# EAGLE board LED_Array (EAGLE 8.6.1)
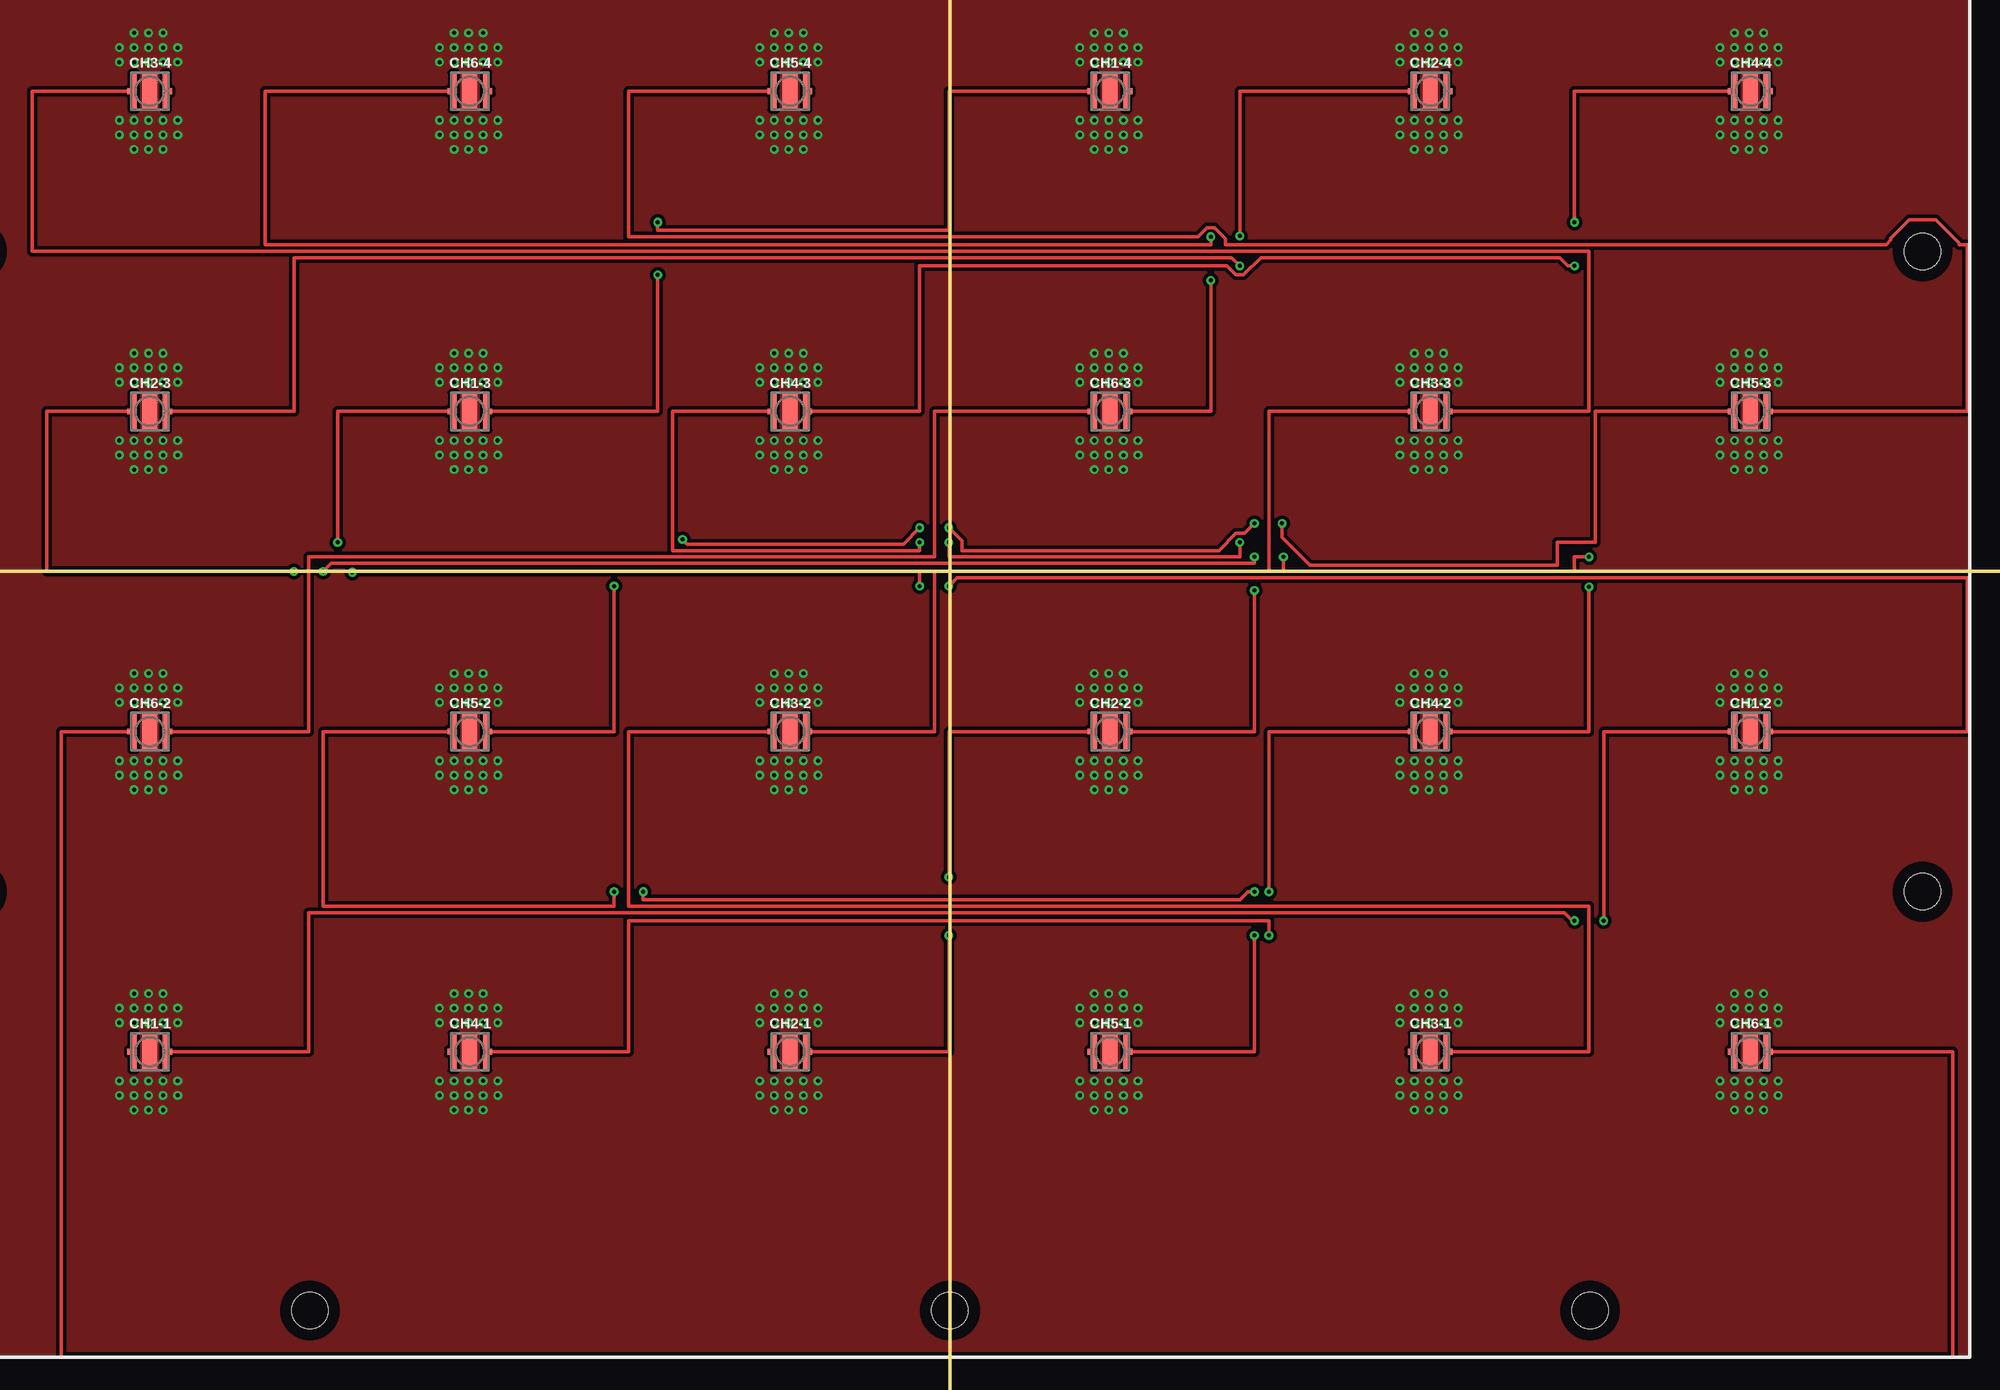
[diagram p0: board, top side]
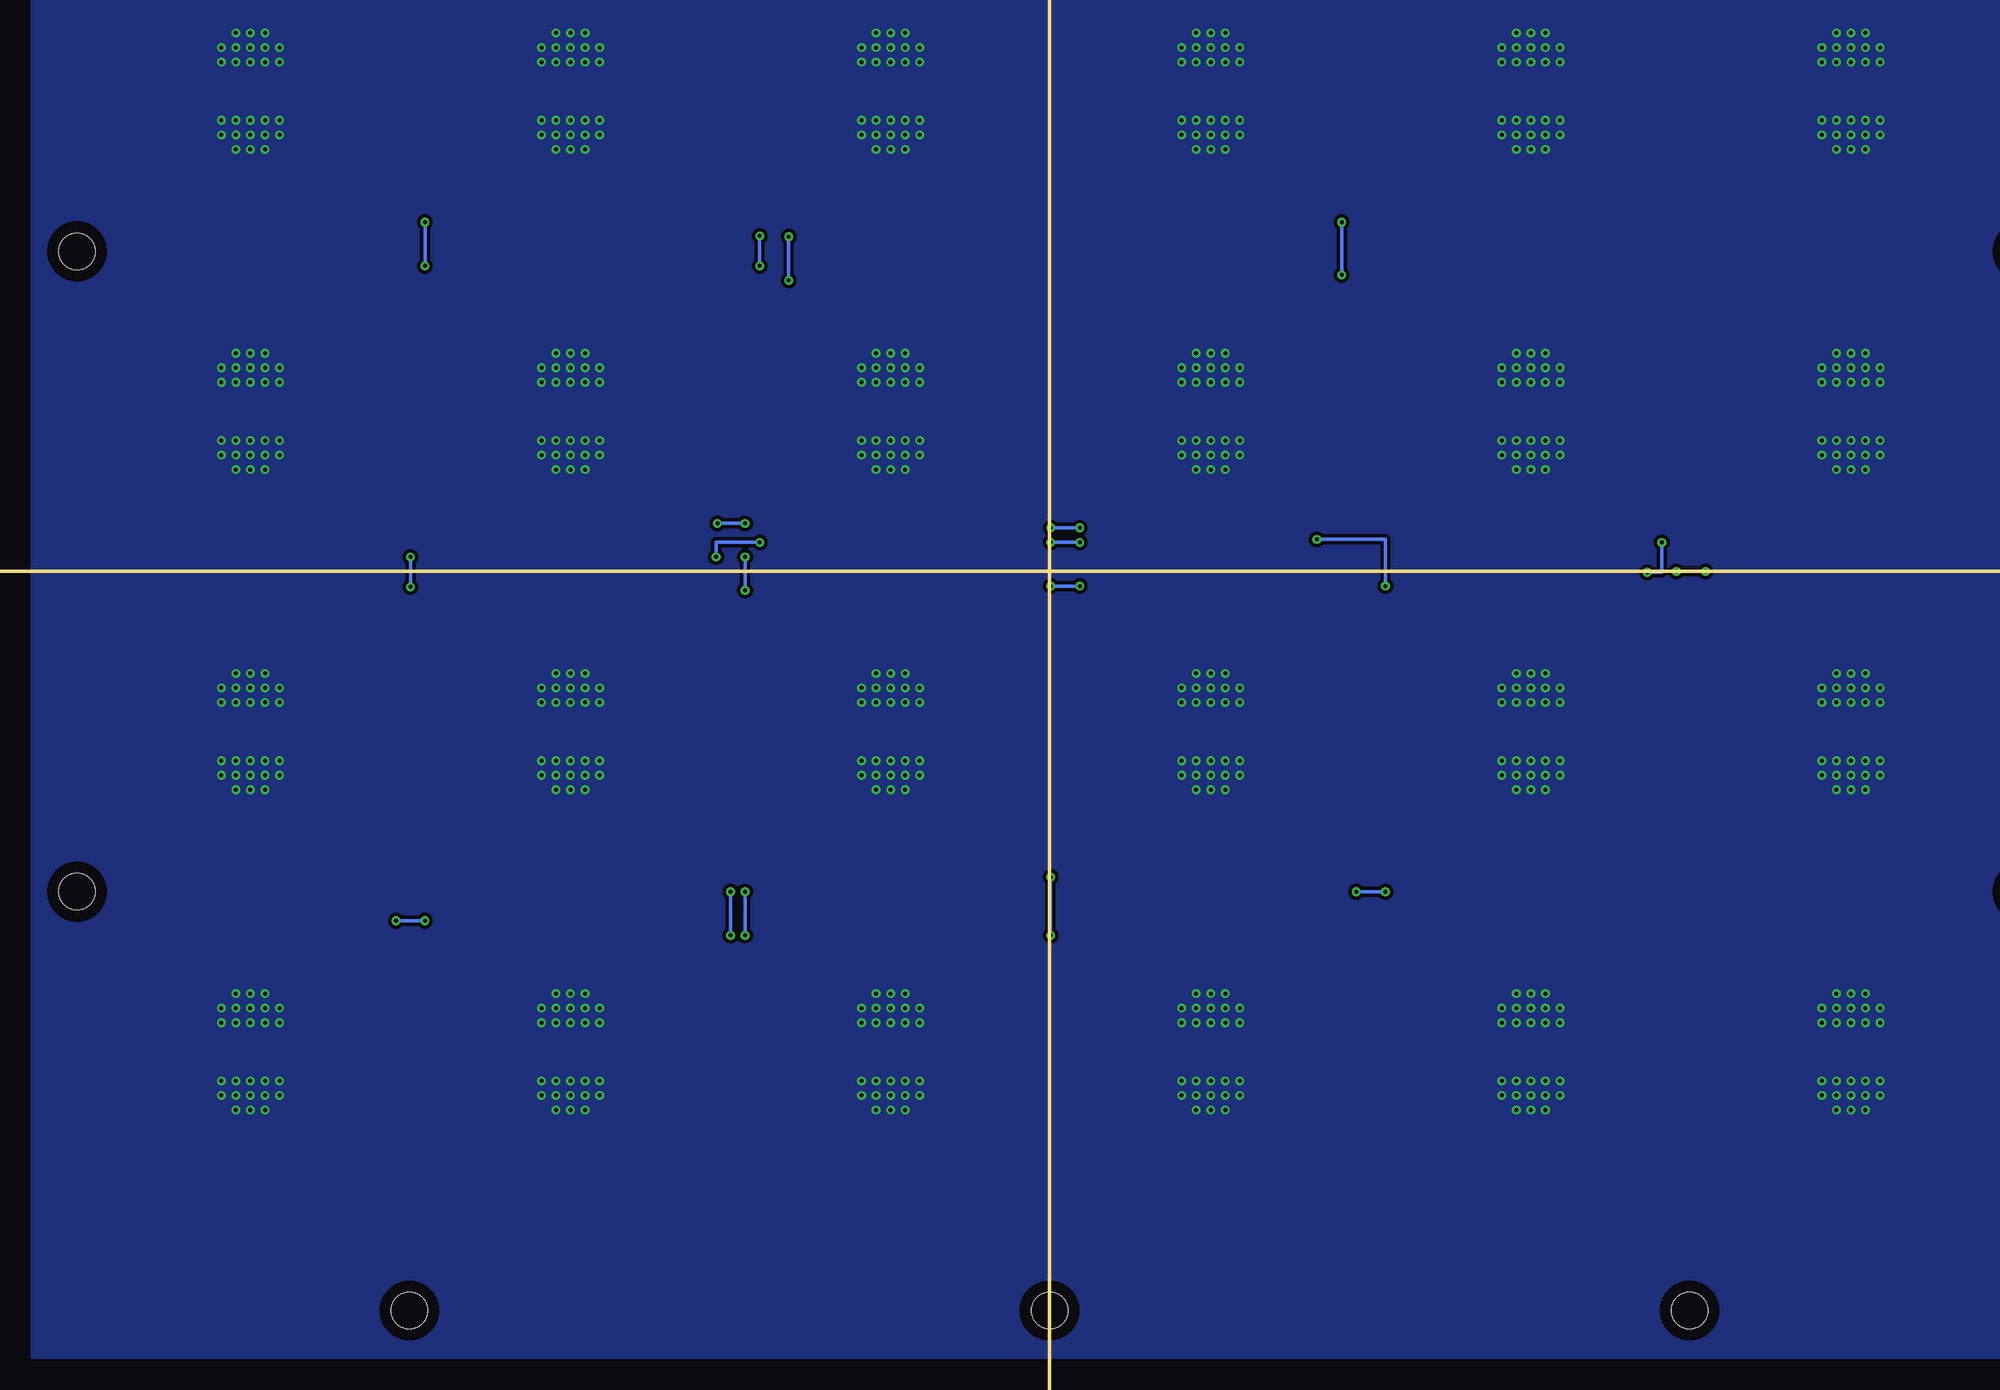
[diagram p1: board, bottom side, seen from below]

No outline drawn. Coordinates in mm, seen from the top.
Copper layers (1*16): Top 0.035mm / dielectric 1.5mm / Bottom 0.035mm
Design rules "default *": minimum track width 6mil, minimum drill 0.35mm, track to track 10mil, track to pad 10mil, pad to pad 6mil, via to via 6mil, smd to smd 6mil, copper to edge 40mil, drill to drill 6mil, minimum pad ring 10mil, minimum via ring 8mil, stop-mask expansion 4mil, vias tented up to drill 0mil, thermal gap 10mil
Holes 3.17 mm at 4.09,40.64 4.09,96.52 33.12,133.07 89,133.07 144.88,133.07 173.89,96.52 173.89,40.64 144.88,4.09 89,4.09 33.12,4.09
Milling: 2 lines

## Footprints (pad centres in the part's own frame; a part is rotated, then mirrored left to right if it is on the bottom)
CREE-XLAMP-XP-E = smd 0.5 x 3.3: A 1.4,0; C -1.4,0 | smd 0.45 x 0.5: A@1 1.725,0; C@1 -1.725,0 | smd 1.3 x 3.3: THERM 0,0

## Placement (x,y rotation side)
CH1-1  XP-E  [CREE-XLAMP-XP-E]  19.15,26.67 0 top
CH1-2  XP-E  [CREE-XLAMP-XP-E]  158.85,54.61 0 top
CH1-3  XP-E  [CREE-XLAMP-XP-E]  47.09,82.55 0 top
CH1-4  XP-E  [CREE-XLAMP-XP-E]  102.97,110.49 0 top
CH2-1  XP-E  [CREE-XLAMP-XP-E]  75.03,26.67 0 top
CH2-2  XP-E  [CREE-XLAMP-XP-E]  102.97,54.61 0 top
CH2-3  XP-E  [CREE-XLAMP-XP-E]  19.15,82.55 0 top
CH2-4  XP-E  [CREE-XLAMP-XP-E]  130.91,110.49 0 top
CH3-1  XP-E  [CREE-XLAMP-XP-E]  130.91,26.67 0 top
CH3-2  XP-E  [CREE-XLAMP-XP-E]  75.03,54.61 0 top
CH3-3  XP-E  [CREE-XLAMP-XP-E]  130.91,82.55 0 top
CH3-4  XP-E  [CREE-XLAMP-XP-E]  19.15,110.49 0 top
CH4-1  XP-E  [CREE-XLAMP-XP-E]  47.09,26.67 0 top
CH4-2  XP-E  [CREE-XLAMP-XP-E]  130.91,54.61 0 top
CH4-3  XP-E  [CREE-XLAMP-XP-E]  75.03,82.55 0 top
CH4-4  XP-E  [CREE-XLAMP-XP-E]  158.85,110.49 0 top
CH5-1  XP-E  [CREE-XLAMP-XP-E]  102.97,26.67 0 top
CH5-2  XP-E  [CREE-XLAMP-XP-E]  47.09,54.61 0 top
CH5-3  XP-E  [CREE-XLAMP-XP-E]  158.85,82.55 0 top
CH5-4  XP-E  [CREE-XLAMP-XP-E]  75.03,110.49 0 top
CH6-1  XP-E  [CREE-XLAMP-XP-E]  158.85,26.67 0 top
CH6-2  XP-E  [CREE-XLAMP-XP-E]  19.15,54.61 0 top
CH6-3  XP-E  [CREE-XLAMP-XP-E]  102.97,82.55 0 top
CH6-4  XP-E  [CREE-XLAMP-XP-E]  47.09,110.49 0 top

## Library data of the parts
CH1-1-CH1-4 CH2-1-CH2-4 CH3-1-CH3-4 CH4-1-CH4-4 CH5-1-CH5-4 CH6-1-CH6-4 = Tomaszewski

## Nets
N$1: CH2-1.A CH2-1.A@1 CH2-2.C CH2-2.C@1
N$2: CH2-2.A CH2-2.A@1 CH2-3.C CH2-3.C@1
N$3: CH2-3.A CH2-3.A@1 CH2-4.C CH2-4.C@1
N$4: CH4-1.A CH4-1.A@1 CH4-2.C CH4-2.C@1
N$5: CH4-2.A CH4-2.A@1 CH4-3.C CH4-3.C@1
N$6: CH4-3.A CH4-3.A@1 CH4-4.C CH4-4.C@1
N$7: CH6-1.A CH6-1.A@1 CH6-2.C CH6-2.C@1
N$8: CH6-2.A CH6-2.A@1 CH6-3.C CH6-3.C@1
N$9: CH6-3.A CH6-3.A@1 CH6-4.C CH6-4.C@1
N$10: CH1-1.A CH1-1.A@1 CH1-2.C CH1-2.C@1
N$11: CH1-2.A CH1-2.A@1 CH1-3.C CH1-3.C@1
N$12: CH1-3.A CH1-3.A@1 CH1-4.C CH1-4.C@1
N$13: CH3-1.A CH3-1.A@1 CH3-2.C CH3-2.C@1
N$14: CH3-2.A CH3-2.A@1 CH3-3.C CH3-3.C@1
N$15: CH3-3.A CH3-3.A@1 CH3-4.C CH3-4.C@1
N$16: CH5-1.A CH5-1.A@1 CH5-2.C CH5-2.C@1
N$17: CH5-2.A CH5-2.A@1 CH5-3.C CH5-3.C@1
N$18: CH5-3.A CH5-3.A@1 CH5-4.C CH5-4.C@1
T: CH1-1.THERM CH1-2.THERM CH1-3.THERM CH1-4.THERM CH2-1.THERM CH2-2.THERM CH2-3.THERM CH2-4.THERM CH3-1.THERM CH3-2.THERM CH3-3.THERM CH3-4.THERM CH4-1.THERM CH4-2.THERM CH4-3.THERM CH4-4.THERM CH5-1.THERM CH5-2.THERM CH5-3.THERM CH5-4.THERM CH6-1.THERM CH6-2.THERM CH6-3.THERM CH6-4.THERM

## Tracks (layer width: path | path; a pad name or v marks a point on that pad's centre or on a via)
N$1  (via drill 0.35)
  Top 0.305: CH2-2.C 88.9,54.61 v88.9,41.91 | v88.9,36.83 88.9,26.67 CH2-1.A@1
  Bottom 0.305: v88.9,41.91 v88.9,36.83
N$2  (via drill 0.35)
  Top 0.305: CH2-3.C@1 10.16,82.55 10.16,68.58 v31.75,68.58 | v34.29,68.58 35,69.29 115.57,69.29 v115.57,69.85 | v115.57,66.93 115.57,54.61 CH2-2.A@1
  Bottom 0.305: v31.75,68.58 v34.29,68.58 | v115.57,69.85 v115.57,66.93
N$3  (via drill 0.35)
  Top 0.305: CH2-4.C@1 114.3,110.49 v114.3,97.86 | v114.3,95.25 113.59,95.96 31.75,95.96 31.75,82.55 CH2-3.A
  Bottom 0.305: v114.3,97.86 v114.3,95.25
N$4  (via drill 0.35)
  Top 0.305: CH4-1.A 60.96,26.67 60.96,38.1 116.84,38.1 v116.84,36.83 | v116.84,40.64 116.84,54.61 CH4-2.C
  Bottom 0.305: v116.84,36.83 v116.84,40.64
N$5  (via drill 0.35)
  Top 0.305: CH4-2.A 144.78,54.61 v144.78,67.24 | v144.78,69.85 143.51,69.85 143.51,68.58 118.11,68.58 v118.11,69.85 | v114.3,71.12 114.3,69.85 88.9,69.85 v88.9,71.12 | v86.36,71.12 86.36,70.41 64.77,70.41 64.77,82.55 CH4-3.C@1
  Bottom 0.305: v144.78,67.24 v144.78,69.85 | v118.11,69.85 118.11,71.12 v114.3,71.12 | v88.9,71.12 v86.36,71.12
N$6  (via drill 0.35)
  Top 0.305: CH4-4.C 143.51,110.49 v143.51,99.06 | v143.51,95.25 142.95,95.25 142.24,95.96 116.12,95.96 114.62,94.47 113.97,94.47 113.19,95.25 86.36,95.25 86.36,82.55 CH4-3.A@1
  Bottom 0.305: v143.51,99.06 v143.51,95.25
N$7
  Top 0.305: CH6-2.C 11.43,54.61 11.43,0 176.53,0 176.53,26.67 CH6-1.A
N$8
  Top 0.305: CH6-3.C@1 87.63,82.55 87.63,69.85 33.02,69.85 33.02,54.61 CH6-2.A
N$9  (via drill 0.35)
  Top 0.305: 33.02,110.49 CH6-4.C@1 29.21,110.49 29.21,97.08 111.76,97.08 v111.76,97.79 | v111.76,93.98 111.76,82.55 CH6-3.A@1
  Bottom 0.305: v111.76,97.79 v111.76,93.98
N$10  (via drill 0.35)
  Top 0.305: CH1-2.C 146.05,54.61 v146.05,38.1 | v143.51,38.1 143.33,38.1 142.62,38.81 33.02,38.81 33.02,26.67 CH1-1.A@1
  Bottom 0.305: v146.05,38.1 v143.51,38.1
N$11  (via drill 0.35)
  Top 0.305: CH1-3.C 35.56,82.55 v35.56,71.12 | v36.83,68.51 36.83,68.58 86.36,68.58 v86.36,67.31 | v88.9,67.31 89.61,68.02 177.8,68.02 177.8,54.61 CH1-2.A@1
  Bottom 0.305: v35.56,71.12 35.56,68.51 v36.83,68.51 | v86.36,67.31 v88.9,67.31
N$12  (via drill 0.35)
  Top 0.305: CH1-4.C 88.9,110.49 88.9,98.35 63.5,98.35 v63.5,99.06 | v63.5,94.47 63.5,82.55 CH1-3.A
  Bottom 0.305: v63.5,99.06 v63.5,94.47
N$13
  Top 0.305: CH3-2.C 60.96,54.61 60.96,39.37 144.78,39.37 144.78,26.67 CH3-1.A@1
N$14
  Top 0.305: CH3-2.A@1 87.63,54.61 87.63,68.58 116.84,68.58 116.84,82.55 CH3-3.C@1
N$15
  Top 0.305: CH3-4.C@1 8.89,110.49 8.89,96.52 144.78,96.52 144.78,82.55 CH3-3.A@1
N$16  (via drill 0.35)
  Top 0.305: CH5-1.A 115.57,26.67 v115.57,36.83 | v115.57,40.64 115.01,40.64 114.3,39.93 62.23,39.93 v62.23,40.64 | v59.69,40.64 59.69,39.37 34.29,39.37 34.29,54.61 CH5-2.C
  Bottom 0.305: v115.57,36.83 v115.57,40.64 | v62.23,40.64 v59.69,40.64
N$17  (via drill 0.35)
  Top 0.305: CH5-2.A 59.69,54.61 v59.69,67.31 | v65.66,71.37 66.06,70.97 84.94,70.97 v86.36,72.39 | v88.9,72.39 90.04,71.25 90.04,70.41 112.48,70.41 113.97,71.91 114.7,71.91 v115.57,72.77 | v117.98,72.77 117.98,71.55 120.4,69.14 142.01,69.14 142.01,71.12 145.34,71.12 145.34,82.55 CH5-3.C@1
  Bottom 0.305: v59.69,67.31 59.69,71.37 v65.66,71.37 | v86.36,72.39 v88.9,72.39 | v115.57,72.77 v117.98,72.77
N$18
  Top 0.305: CH5-4.C@1 60.96,110.49 60.96,97.79 110.65,97.79 111.44,98.58 112.08,98.58 113.03,97.63 113.03,97.08 170.7,97.08 171.13,97.51 171.13,97.66 172.75,99.28 175.03,99.28 177.23,97.08 | CH5-3.A 177.8,82.55 177.8,97.08 177.23,97.08 | 177.07,97.08 177.23,97.08
T  (via drill 0.35)
  other vias: 16.51,113.03 16.51,114.3 17.78,115.57 17.78,114.3 17.78,113.03 19.05,115.57 19.05,114.3 19.05,113.03 20.32,115.57 20.32,114.3 20.32,113.03 21.59,114.3 21.59,113.03 16.51,107.95 17.78,107.95 19.05,107.95 20.32,107.95 21.59,107.95 21.59,106.68 20.32,106.68 19.05,106.68 17.78,106.68 16.51,106.68 17.78,105.41 19.05,105.41 20.32,105.41 44.45,113.03 44.45,114.3 45.72,115.57 45.72,114.3 45.72,113.03 46.99,115.57 46.99,114.3 46.99,113.03 48.26,115.57 48.26,114.3 48.26,113.03 49.53,114.3 49.53,113.03 44.45,107.95 45.72,107.95 46.99,107.95 48.26,107.95 49.53,107.95 49.53,106.68 48.26,106.68 46.99,106.68 45.72,106.68 44.45,106.68 45.72,105.41 46.99,105.41 48.26,105.41 72.39,113.03 72.39,114.3 73.66,115.57 73.66,114.3 73.66,113.03 74.93,115.57 74.93,114.3 74.93,113.03 76.2,115.57 76.2,114.3 76.2,113.03 77.47,114.3 77.47,113.03 72.39,107.95 73.66,107.95 74.93,107.95 76.2,107.95 77.47,107.95 77.47,106.68 76.2,106.68 74.93,106.68 73.66,106.68 72.39,106.68 73.66,105.41 74.93,105.41 76.2,105.41 100.33,113.03 100.33,114.3 101.6,115.57 101.6,114.3 101.6,113.03 102.87,115.57 102.87,114.3 102.87,113.03 104.14,115.57 104.14,114.3 104.14,113.03 105.41,114.3 105.41,113.03 100.33,107.95 101.6,107.95 102.87,107.95 104.14,107.95 105.41,107.95 105.41,106.68 104.14,106.68 102.87,106.68 101.6,106.68 100.33,106.68 101.6,105.41 102.87,105.41 104.14,105.41 128.27,113.03 128.27,114.3 129.54,115.57 129.54,114.3 129.54,113.03 130.81,115.57 130.81,114.3 130.81,113.03 132.08,115.57 132.08,114.3 132.08,113.03 133.35,114.3 133.35,113.03 128.27,107.95 129.54,107.95 130.81,107.95 132.08,107.95 133.35,107.95 133.35,106.68 132.08,106.68 130.81,106.68 129.54,106.68 128.27,106.68 129.54,105.41 130.81,105.41 132.08,105.41 156.21,113.03 156.21,114.3 157.48,115.57 157.48,114.3 157.48,113.03 158.75,115.57 158.75,114.3 158.75,113.03 160.02,115.57 160.02,114.3 160.02,113.03 161.29,114.3 161.29,113.03 156.21,107.95 157.48,107.95 158.75,107.95 160.02,107.95 161.29,107.95 161.29,106.68 160.02,106.68 158.75,106.68 157.48,106.68 156.21,106.68 157.48,105.41 158.75,105.41 160.02,105.41 16.51,29.21 16.51,30.48 17.78,31.75 17.78,30.48 17.78,29.21 19.05,31.75 19.05,30.48 19.05,29.21 20.32,31.75 20.32,30.48 20.32,29.21 21.59,30.48 21.59,29.21 16.51,24.13 17.78,24.13 19.05,24.13 20.32,24.13 21.59,24.13 21.59,22.86 20.32,22.86 19.05,22.86 17.78,22.86 16.51,22.86 17.78,21.59 19.05,21.59 20.32,21.59 44.45,29.21 44.45,30.48 45.72,31.75 45.72,30.48 45.72,29.21 46.99,31.75 46.99,30.48 46.99,29.21 48.26,31.75 48.26,30.48 48.26,29.21 49.53,30.48 49.53,29.21 44.45,24.13 45.72,24.13 46.99,24.13 48.26,24.13 49.53,24.13 49.53,22.86 48.26,22.86 46.99,22.86 45.72,22.86 44.45,22.86 45.72,21.59 46.99,21.59 48.26,21.59 72.39,29.21 72.39,30.48 73.66,31.75 73.66,30.48 73.66,29.21 74.93,31.75 74.93,30.48 74.93,29.21 76.2,31.75 76.2,30.48 76.2,29.21 77.47,30.48 77.47,29.21 72.39,24.13 73.66,24.13 74.93,24.13 76.2,24.13 77.47,24.13 77.47,22.86 76.2,22.86 74.93,22.86 73.66,22.86 72.39,22.86 73.66,21.59 74.93,21.59 76.2,21.59 100.33,29.21 100.33,30.48 101.6,31.75 101.6,30.48 101.6,29.21 102.87,31.75 102.87,30.48 102.87,29.21 104.14,31.75 104.14,30.48 104.14,29.21 105.41,30.48 105.41,29.21 100.33,24.13 101.6,24.13 102.87,24.13 104.14,24.13 105.41,24.13 105.41,22.86 104.14,22.86 102.87,22.86 101.6,22.86 100.33,22.86 101.6,21.59 102.87,21.59 104.14,21.59 128.27,29.21 128.27,30.48 129.54,31.75 129.54,30.48 129.54,29.21 130.81,31.75 130.81,30.48 130.81,29.21 132.08,31.75 132.08,30.48 132.08,29.21 133.35,30.48 133.35,29.21 128.27,24.13 129.54,24.13 130.81,24.13 132.08,24.13 133.35,24.13 133.35,22.86 132.08,22.86 130.81,22.86 129.54,22.86 128.27,22.86 129.54,21.59 130.81,21.59 132.08,21.59 156.21,29.21 156.21,30.48 157.48,31.75 157.48,30.48 157.48,29.21 158.75,31.75 158.75,30.48 158.75,29.21 160.02,31.75 160.02,30.48 160.02,29.21 161.29,30.48 161.29,29.21 156.21,24.13 157.48,24.13 158.75,24.13 160.02,24.13 161.29,24.13 161.29,22.86 160.02,22.86 158.75,22.86 157.48,22.86 156.21,22.86 157.48,21.59 158.75,21.59 160.02,21.59 16.51,57.15 16.51,58.42 17.78,59.69 17.78,58.42 17.78,57.15 19.05,59.69 19.05,58.42 19.05,57.15 20.32,59.69 20.32,58.42 20.32,57.15 21.59,58.42 21.59,57.15 16.51,52.07 17.78,52.07 19.05,52.07 20.32,52.07 21.59,52.07 21.59,50.8 20.32,50.8 19.05,50.8 17.78,50.8 16.51,50.8 17.78,49.53 19.05,49.53 20.32,49.53 44.45,57.15 44.45,58.42 45.72,59.69 45.72,58.42 45.72,57.15 46.99,59.69 46.99,58.42 46.99,57.15 48.26,59.69 48.26,58.42 48.26,57.15 49.53,58.42 49.53,57.15 44.45,52.07 45.72,52.07 46.99,52.07 48.26,52.07 49.53,52.07 49.53,50.8 48.26,50.8 46.99,50.8 45.72,50.8 44.45,50.8 45.72,49.53 46.99,49.53 48.26,49.53 72.39,57.15 72.39,58.42 73.66,59.69 73.66,58.42 73.66,57.15 74.93,59.69 74.93,58.42 74.93,57.15 76.2,59.69 76.2,58.42 76.2,57.15 77.47,58.42 77.47,57.15 72.39,52.07 73.66,52.07 74.93,52.07 76.2,52.07 77.47,52.07 77.47,50.8 76.2,50.8 74.93,50.8 73.66,50.8 72.39,50.8 73.66,49.53 74.93,49.53 76.2,49.53 100.33,57.15 100.33,58.42 101.6,59.69 101.6,58.42 101.6,57.15 102.87,59.69 102.87,58.42 102.87,57.15 104.14,59.69 104.14,58.42 104.14,57.15 105.41,58.42 105.41,57.15 100.33,52.07 101.6,52.07 102.87,52.07 104.14,52.07 105.41,52.07 105.41,50.8 104.14,50.8 102.87,50.8 101.6,50.8 100.33,50.8 101.6,49.53 102.87,49.53 104.14,49.53 128.27,57.15 128.27,58.42 129.54,59.69 129.54,58.42 129.54,57.15 130.81,59.69 130.81,58.42 130.81,57.15 132.08,59.69 132.08,58.42 132.08,57.15 133.35,58.42 133.35,57.15 128.27,52.07 129.54,52.07 130.81,52.07 132.08,52.07 133.35,52.07 133.35,50.8 132.08,50.8 130.81,50.8 129.54,50.8 128.27,50.8 129.54,49.53 130.81,49.53 132.08,49.53 156.21,57.15 156.21,58.42 157.48,59.69 157.48,58.42 157.48,57.15 158.75,59.69 158.75,58.42 158.75,57.15 160.02,59.69 160.02,58.42 160.02,57.15 161.29,58.42 161.29,57.15 156.21,52.07 157.48,52.07 158.75,52.07 160.02,52.07 161.29,52.07 161.29,50.8 160.02,50.8 158.75,50.8 157.48,50.8 156.21,50.8 157.48,49.53 158.75,49.53 160.02,49.53 16.51,85.09 16.51,86.36 17.78,87.63 17.78,86.36 17.78,85.09 19.05,87.63 19.05,86.36 19.05,85.09 20.32,87.63 20.32,86.36 20.32,85.09 21.59,86.36 21.59,85.09 16.51,80.01 17.78,80.01 19.05,80.01 20.32,80.01 21.59,80.01 21.59,78.74 20.32,78.74 19.05,78.74 17.78,78.74 16.51,78.74 17.78,77.47 19.05,77.47 20.32,77.47 44.45,85.09 44.45,86.36 45.72,87.63 45.72,86.36 45.72,85.09 46.99,87.63 46.99,86.36 46.99,85.09 48.26,87.63 48.26,86.36 48.26,85.09 49.53,86.36 49.53,85.09 44.45,80.01 45.72,80.01 46.99,80.01 48.26,80.01 49.53,80.01 49.53,78.74 48.26,78.74 46.99,78.74 45.72,78.74 44.45,78.74 45.72,77.47 46.99,77.47 48.26,77.47 72.39,85.09 72.39,86.36 73.66,87.63 73.66,86.36 73.66,85.09 74.93,87.63 74.93,86.36 74.93,85.09 76.2,87.63 76.2,86.36 76.2,85.09 77.47,86.36 77.47,85.09 72.39,80.01 73.66,80.01 74.93,80.01 76.2,80.01 77.47,80.01 77.47,78.74 76.2,78.74 74.93,78.74 73.66,78.74 72.39,78.74 73.66,77.47 74.93,77.47 76.2,77.47 100.33,85.09 100.33,86.36 101.6,87.63 101.6,86.36 101.6,85.09 102.87,87.63 102.87,86.36 102.87,85.09 104.14,87.63 104.14,86.36 104.14,85.09 105.41,86.36 105.41,85.09 100.33,80.01 101.6,80.01 102.87,80.01 104.14,80.01 105.41,80.01 105.41,78.74 104.14,78.74 102.87,78.74 101.6,78.74 100.33,78.74 101.6,77.47 102.87,77.47 104.14,77.47 128.27,85.09 128.27,86.36 129.54,87.63 129.54,86.36 129.54,85.09 130.81,87.63 130.81,86.36 130.81,85.09 132.08,87.63 132.08,86.36 132.08,85.09 133.35,86.36 133.35,85.09 128.27,80.01 129.54,80.01 130.81,80.01 132.08,80.01 133.35,80.01 133.35,78.74 132.08,78.74 130.81,78.74 129.54,78.74 128.27,78.74 129.54,77.47 130.81,77.47 132.08,77.47 156.21,85.09 156.21,86.36 157.48,87.63 157.48,86.36 157.48,85.09 158.75,87.63 158.75,86.36 158.75,85.09 160.02,87.63 160.02,86.36 160.02,85.09 161.29,86.36 161.29,85.09 156.21,80.01 157.48,80.01 158.75,80.01 160.02,80.01 161.29,80.01 161.29,78.74 160.02,78.74 158.75,78.74 157.48,78.74 156.21,78.74 157.48,77.47 158.75,77.47 160.02,77.47
  pour Top (isolate 0.305, no thermals): 0,137.16 0,0 177.8,0 177.8,137.16
  pour Bottom (isolate 0.305, no thermals): 0,137.16 0,0 177.8,0 177.8,137.16